# Altium PCB PCB_nguon.PcbDoc
Units mil, origin at the board's own origin, x right, y up, seen from the top; angles counter-clockwise.
Board outline 2160 x 780 mil, 2 copper layers (Top Layer, Bottom Layer); 26 components, 6 nets, 60 pads, 0 vias.
Unrouted connection lines stored in the file: 1.
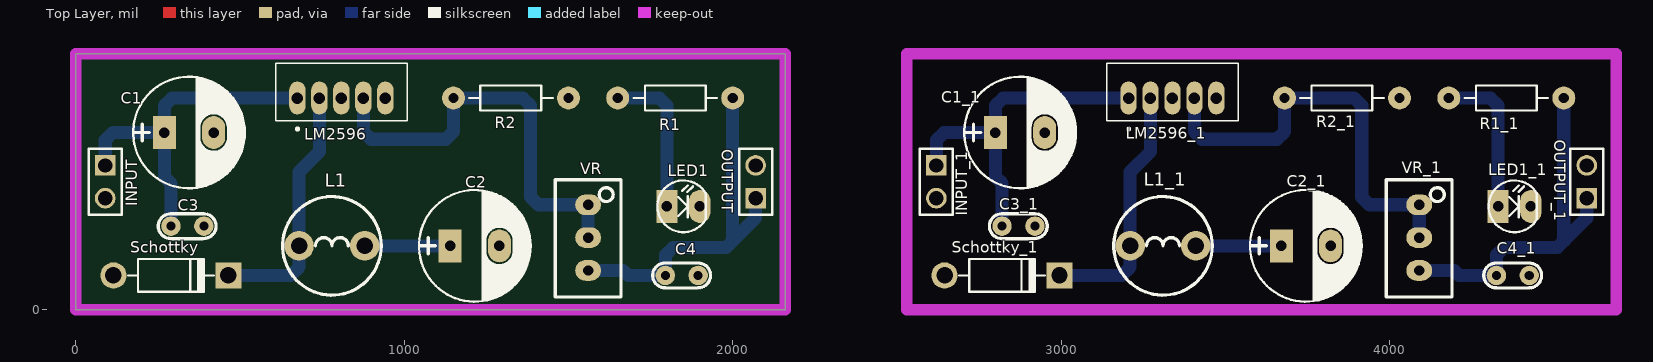
[diagram p0: Top Layer view]
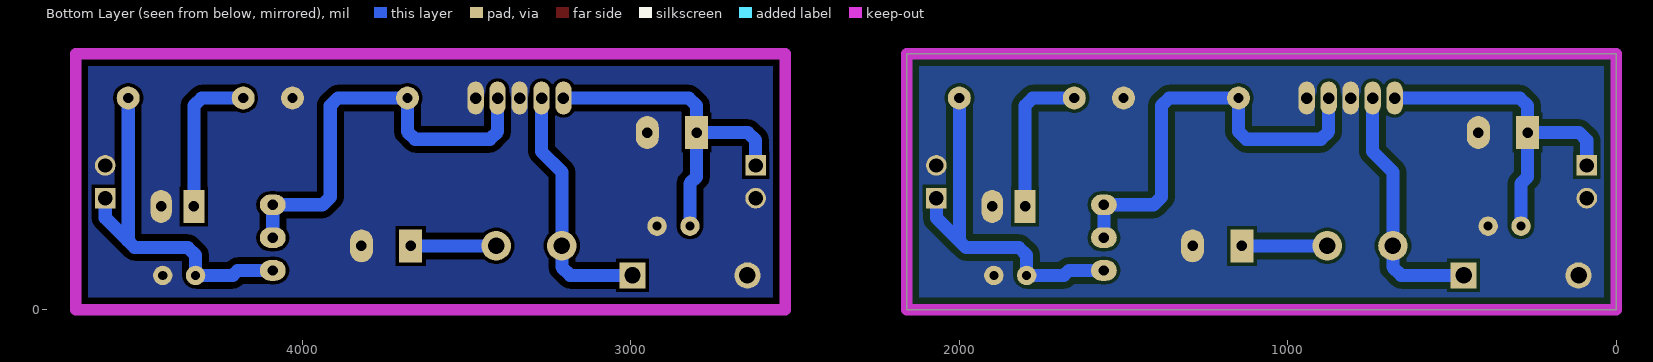
[diagram p1: Bottom Layer view, seen from below]

## Layer stack, top to bottom
Top Solder: solder mask 0.4, Solder Resist, Dk 3.5
Top Layer: signal copper 1.4
Dielectric 1: dielectric 12.6, FR-4, Dk 4.8
Bottom Layer: signal copper 1.4
Bottom Solder: solder mask 0.4, Solder Resist, Dk 3.5

## Board outline
0,0 0,780 2160,780 2160,0

## Design rules (kind name [scope] priority, off if disabled: settings)
Clearance [All] p1: gap=10 ignorepadtopadclearanceinfootprint=FALSE except(0: Arc-Hole Track-Hole SMDPad-Hole THPad-Hole Via-Hole Fill-Hole Poly-Hole Region-Hole Text-Hole; 20: Arc-Arc Arc-Track Arc-Fill Arc-Poly Arc-Region Track-Track Track-Fill Track-Poly Track-Region)
PolygonConnect [All] p1: connectstyle=Direct reliefconductorwidth=10 reliefentries=4 polygonreliefangle="90 Angle" airgapwidth=10
RoutingVias [All] p1: holewidth=28 width=50 viastyle="Through Hole" minholewidth=28 minwidth=50 maxholewidth=28 maxwidth=50
SolderMaskExpansion [All] p1: expansion=4 istentingtop=FALSE
Width [All] p1: maxlimit=50 minlimit=40 preferedwidth=40
30 further rules are at their usual default settings.

## Classes and differential pairs
component class Sheet1: C1 C2 C3 C4 INPUT L1 LED1 LM2596 OUTPUT R1 R2 Schottky VR

## Components (designator, comment, footprint, x,y, rotation, side; value= is the part's Value field where it differs from the comment)
C1 "100uF/50V" CP1.5/3.4 270,540 r0 top value=100uF/35V/50V
C1_1 "100uF/50V" CP1.5/3.4 2800,540 r0 top value=100uF/35V/50V (schematic designator C1)
C2 "100uF/50V" CP1.5/3.4 1140,195 r0 top value=100uF/35V/50V
C2_1 "100uF/50V" CP1.5/3.4 3670,195 r0 top value=100uF/35V/50V (schematic designator C2)
C3 "105-1uf" "tu gom" 340,255 r0 top
C3_1 "105-1uf" "tu gom" 2870,255 r0 top (schematic designator C3)
C4 "105-1uf" "tu gom" 1845,105 r0 top
C4_1 "105-1uf" "tu gom" 4375,105 r0 top (schematic designator C4)
INPUT "INPUT" "JP 1x2 DT" 90,440 r270 top
INPUT_1 "INPUT" "JP 1x2 DT" 2620,440 r270 top (schematic designator INPUT)
L1 "47uH - 3A" "CUON CAM 100uH3A" 780,195 r0 top
L1_1 "47uH - 3A" "CUON CAM 100uH3A" 3310,195 r0 top (schematic designator L1)
LED1 "LED" LED-3 1800,315 r0 top value="LED 3 ly Single Colour"
LED1_1 "LED" LED-3 4330,315 r0 top value="LED 3 ly Single Colour" (schematic designator LED1)
LM2596 "LM2596-5.0WT" TO170P1016X444X1572-5 808.86,645 r0 top
LM2596_1 "LM2596-5.0WT" TO170P1016X444X1572-5 3338.86,645 r0 top (schematic designator LM2596)
OUTPUT "" "JP 1x2 DT" 2070,340 r90 top
OUTPUT_1 "" "JP 1x2 DT" 4600,340 r90 top (schematic designator OUTPUT)
R1 "1k" R1/4W 1650,645 r0 top value="R1/4W - 1K"
R1_1 "1k" R1/4W 4180,645 r0 top value="R1/4W - 1K" (schematic designator R1)
R2 "330" R1/4W 1500,645 r180 top value="R1/4W - 1K"
R2_1 "330" R1/4W 4030,645 r180 top value="R1/4W - 1K" (schematic designator R2)
Schottky "1N5822" D1A 115,105 r180 top
Schottky_1 "1N5822" D1A 2645,105 r180 top (schematic designator Schottky)
VR "10K" "Bien Tro Vi Chinh Dung" 1560,220 r270 top
VR_1 "10K" "Bien Tro Vi Chinh Dung" 4090,220 r270 top (schematic designator VR)

## Footprints (in the part's own frame and the unit in brackets; to place one, negate y for a bottom-side part, rotate by r counter-clockwise, add the part's x,y. Pads: shape width x height; smd on the part's side, far side on the other; paste and mask are expansions set on the pad)
"Bien Tro Vi Chinh Dung" [mm] "Bien tro vi chinh"
  oval 1.6x2 hole 0.8: 1(-2.54,0) 2(0,0) 3(2.54,0)
  silkscreen extent -4.47,-2.54 4.6,2.54, body extent -4.54,-2.4 4.66,2.4, height 12.02
CP1.5/3.4 [mil] "Tu hoa 220->470uF,16V, 470uF/16V,25V"
  rect 70x100 hole 32: 1(0,0)
  oval 70x100 hole 32: 2(150,0)
  silkscreen extent -95,-170 245,170, body extent -85,-157 230,157, height 446
"CUON CAM 100uH3A" [mil] "100uH3A"
  round 90 hole 50: 1(-100,0) 2(100,0)
  silkscreen extent -150,-150 150,150, body extent -171,-175 171,167, height 394
D1A [mil] "Diode 1A, W 100mil, L 350mil"
  round 80 hole 50: 1(0,0)
  rect 80x80 hole 50: 2(-350,0)
  silkscreen extent -305,-50 -45,50, body extent -386,-33 34,36, height 84
"JP 1x2 DT" [mm] "2 pins, 1 row, straight, gold plating"
  rect 1.6x1.6 hole 1.1: 1(0,0)
  round 1.6 hole 1.1: 2(2.54,0)
  silkscreen extent -1.27,-1.27 3.81,1.27, body extent -1.27,-1.27 3.81,1.27, height 8.54
LED-3 [mil] "LED 2 PIN, 3ly Only colour"
  rect 65x100 hole 32: 1(0,0)
  oval 65x100 hole 32: 2(100,0)
  silkscreen extent -29,-78 118,79, body extent -25,-75 113,75, height 217
R1/4W [mil] "R 1/4W, 2 Pin, 350mil"
  round 70 hole 31: 1(0,0) 2(350,0)
  silkscreen extent 48,-38 302,38, body extent -40,-47 386,47, height 111
TO170P1016X444X1572-5 [mil]
  oval 50x100 hole 35: 1(-133.86,0) 2(-66.93,0) 3(0,0) 4(66.93,0) 5(133.86,0)
  silkscreen extent -200,-98 200,106, body extent -200,-58 200,107, height 729
"tu gom" [mm] "Tu gom mini"
  round 1.5 hole 0.7: 1(-1.27,0) 2(1.27,0)
  silkscreen extent -2.25,-0.97 2.22,0.97, body extent -2.92,-0.85 2.92,0.85, height 6.12

## Part data
C1 C1_1 C2 C2_1: library part CP3, "Cap 100uF/35V - 470uF/16V", Description 1="1000uF/6,3V - 470uF/16V - 330uF - 25V", Description 2="220uF/35V - 100uF/50V - 63V - 4,7uF/200V", Description 3="22uF => 33uF100V - 3,3uF => 4,7uF/250V", Description 4="2,2uF =>3,3uF/350 - 2,2uF/400V - 1uF/450V"
C3 C3_1 C4 C4_1: library part "Tu gom 104 50V", "Cắm", Chung_Loai=Cắm, Don_Vi=Con, Ma_Hang=MH004761, So_Chan=2, Ten_Linh_Kien="Tụ gốm 104 100nF 50V"
INPUT INPUT_1 OUTPUT OUTPUT_1: library part "JP 1x2 2.54 Duc Thang", "Cắm", Chung_Loai=Cắm, Don_Vi=Con, Ma_Hang=MH000903, Ten_Linh_Kien="Jump Đơn Đực 2.54MM 1x40P Thẳng 11MM"
L1 L1_1: library part "CUON CAM 470uH DIP", "Cắm", Chung_Loai=Cắm, Don_Vi=Con, Ma_Hang=MH002232, Ten_Linh_Kien="Cuộn Cảm 470uH 3A 8x10MM"
LED1 LED1_1: "LED Single colour Green and Red"
LM2596 LM2596_1: library part LM2576-5.0WT, "Buck Switching Regulator IC Positive Fixed 5V 1 Output 3A TO-220-5", Package="TO-220 Microchip", Check_prices=https://www.snapeda.com/parts/LM2576-5.0WT/Microchip/view-part/?ref=eda, MF=Microchip, MP=LM2576-5.0WT, SnapEDA_Link=https://www.snapeda.com/parts/LM2576-5.0WT/Microchip/view-part/?ref=snap
R1 R1_1 R2 R2_1: library part R1/4W, "Resistor 1/4W"
Schottky Schottky_1: library part Zener
VR VR_1: library part "Bien Tro Tinh Chinh 10K Dung", "Cắm", Chung_Loai=Cắm, Don_Vi=Con, Ma_Hang=MH003232, Ten_Linh_Kien="Biến Trở VR 103-10K 3296W"

## Nets (pads, with @x,y where several pads share a name; then routed paths per layer and width w, separated by ;. In a path a pad name is that pad's centre, name@x,y a point inside that pad or via, vN(x,y) a via of type N, cw(c..) or ccw(c..) an arc to the next point about the centre after c; other vN are vias at no path point)
GND: C1.2 C2.2 C3.2 C4.2 INPUT.2 LED1.2 LM2596.3 LM2596.5 OUTPUT.2 R2.1 Schottky.1
IN+: C1.1 C3.1 INPUT.1 LM2596.1 | length 1055.8
  Bottom Layer w40: INPUT.1 90,516.57 113.43,540 C1.1 ; C3.1 290,385 270,405 C1.1 ; LM2596.1 293.43,645 270,621.57 C1.1
NetL1_1: L1.1 LM2596.2 Schottky.2 | length 765.8
  Bottom Layer w40: Schottky.2 654.64,105 680,130.36 L1.1 680,420 741.93,481.93 LM2596.2
NetLED1_1: LED1.1 R1.1 | length 466.3
  Bottom Layer w40: R1.1 1776.57,645 1800,621.57 LED1.1
NetLM2596_4: LM2596.4 R2.2 VR.1 VR.2 | length 1305.6
  Bottom Layer w40: LM2596.4 875.79,542.8 899.22,519.37 1126.57,519.37 1150,542.8 R2.2 1361.57,645 1385,621.57 1385,343.43 1408.43,320 VR.1 VR.2
OUT+: C2.1 C4.1 L1.2 OUTPUT.1 R1.2 VR.3 | length 1379.8
  Bottom Layer w40: L1.2 C2.1 ; VR.3 1666.57,120 1681.57,105 C4.1 1795,166.57 1818.43,190 1980,190 2003.43,213.43 2070,280 OUTPUT.1 ; 2000,210 R1.2
pads on no net: C1_1.1 C1_1.2 C2_1.1 C2_1.2 C3_1.1 C3_1.2 C4_1.1 C4_1.2 INPUT_1.1 INPUT_1.2 L1_1.1 L1_1.2 LED1_1.1 LED1_1.2 LM2596_1.1 LM2596_1.2 LM2596_1.3 LM2596_1.4 LM2596_1.5 OUTPUT_1.1 OUTPUT_1.2 R1_1.1 R1_1.2 R2_1.1 R2_1.2 Schottky_1.1 Schottky_1.2 VR_1.1 VR_1.2 VR_1.3
copper on no net: | length 4973.2
  Bottom Layer w40: 2620,440 2620,516.57 2643.43,540 2800,540 ; 2820,255 2820,385 2800,405 2800,540 ; 2995,105 3184.64,105 3210,130.36 3210,195 3210,420 3271.93,481.93 3271.93,645 ; 3205,645 2823.43,645 2800,621.57 2800,540 ; 3405.79,645 3405.79,542.8 3429.22,519.37 3656.57,519.37 3680,542.8 3680,645 3891.57,645 3915,621.57 3915,343.43 3938.43,320 4090,320 4090,220 ; 3410,195 3670,195 ; 4090,120 4196.57,120 4211.57,105 4325,105 4325,166.57 4348.43,190 4510,190 4533.43,213.43 4600,280 4600,340 ; 4180,645 4306.57,645 4330,621.57 4330,315 ; 4530,210 4530,645

## Polygon pours and split planes (outlines as drawn)
no net on Bottom Layer "NONET_L02_P001" (solid, pour order 1): 2530,780 4690,780 4690,0 2530,0
GND on Bottom Layer "GND_L02_P000" (solid, pour order 0): 0,780 2160,780 2160,0 0,0

## Keep-outs
Keep-Out Layer:
  lines w35: 0,0 2160,0 2160,780 0,780 0,0 ; 2530,0 2530,780 4690,780 4690,0 2530,0